# Altium PCB Integrated LED Rectangle.PcbDoc
Units mil, origin at the board's own origin, x right, y up, seen from the top; angles counter-clockwise.
Board outline 2000 x 2000 mil, 4 copper layers (Top Layer, Internal Plane 1, Internal Plane 2, Bottom Layer); 18 components, 28 nets, 81 pads, 0 vias.
Unrouted connection lines stored in the file: 45.
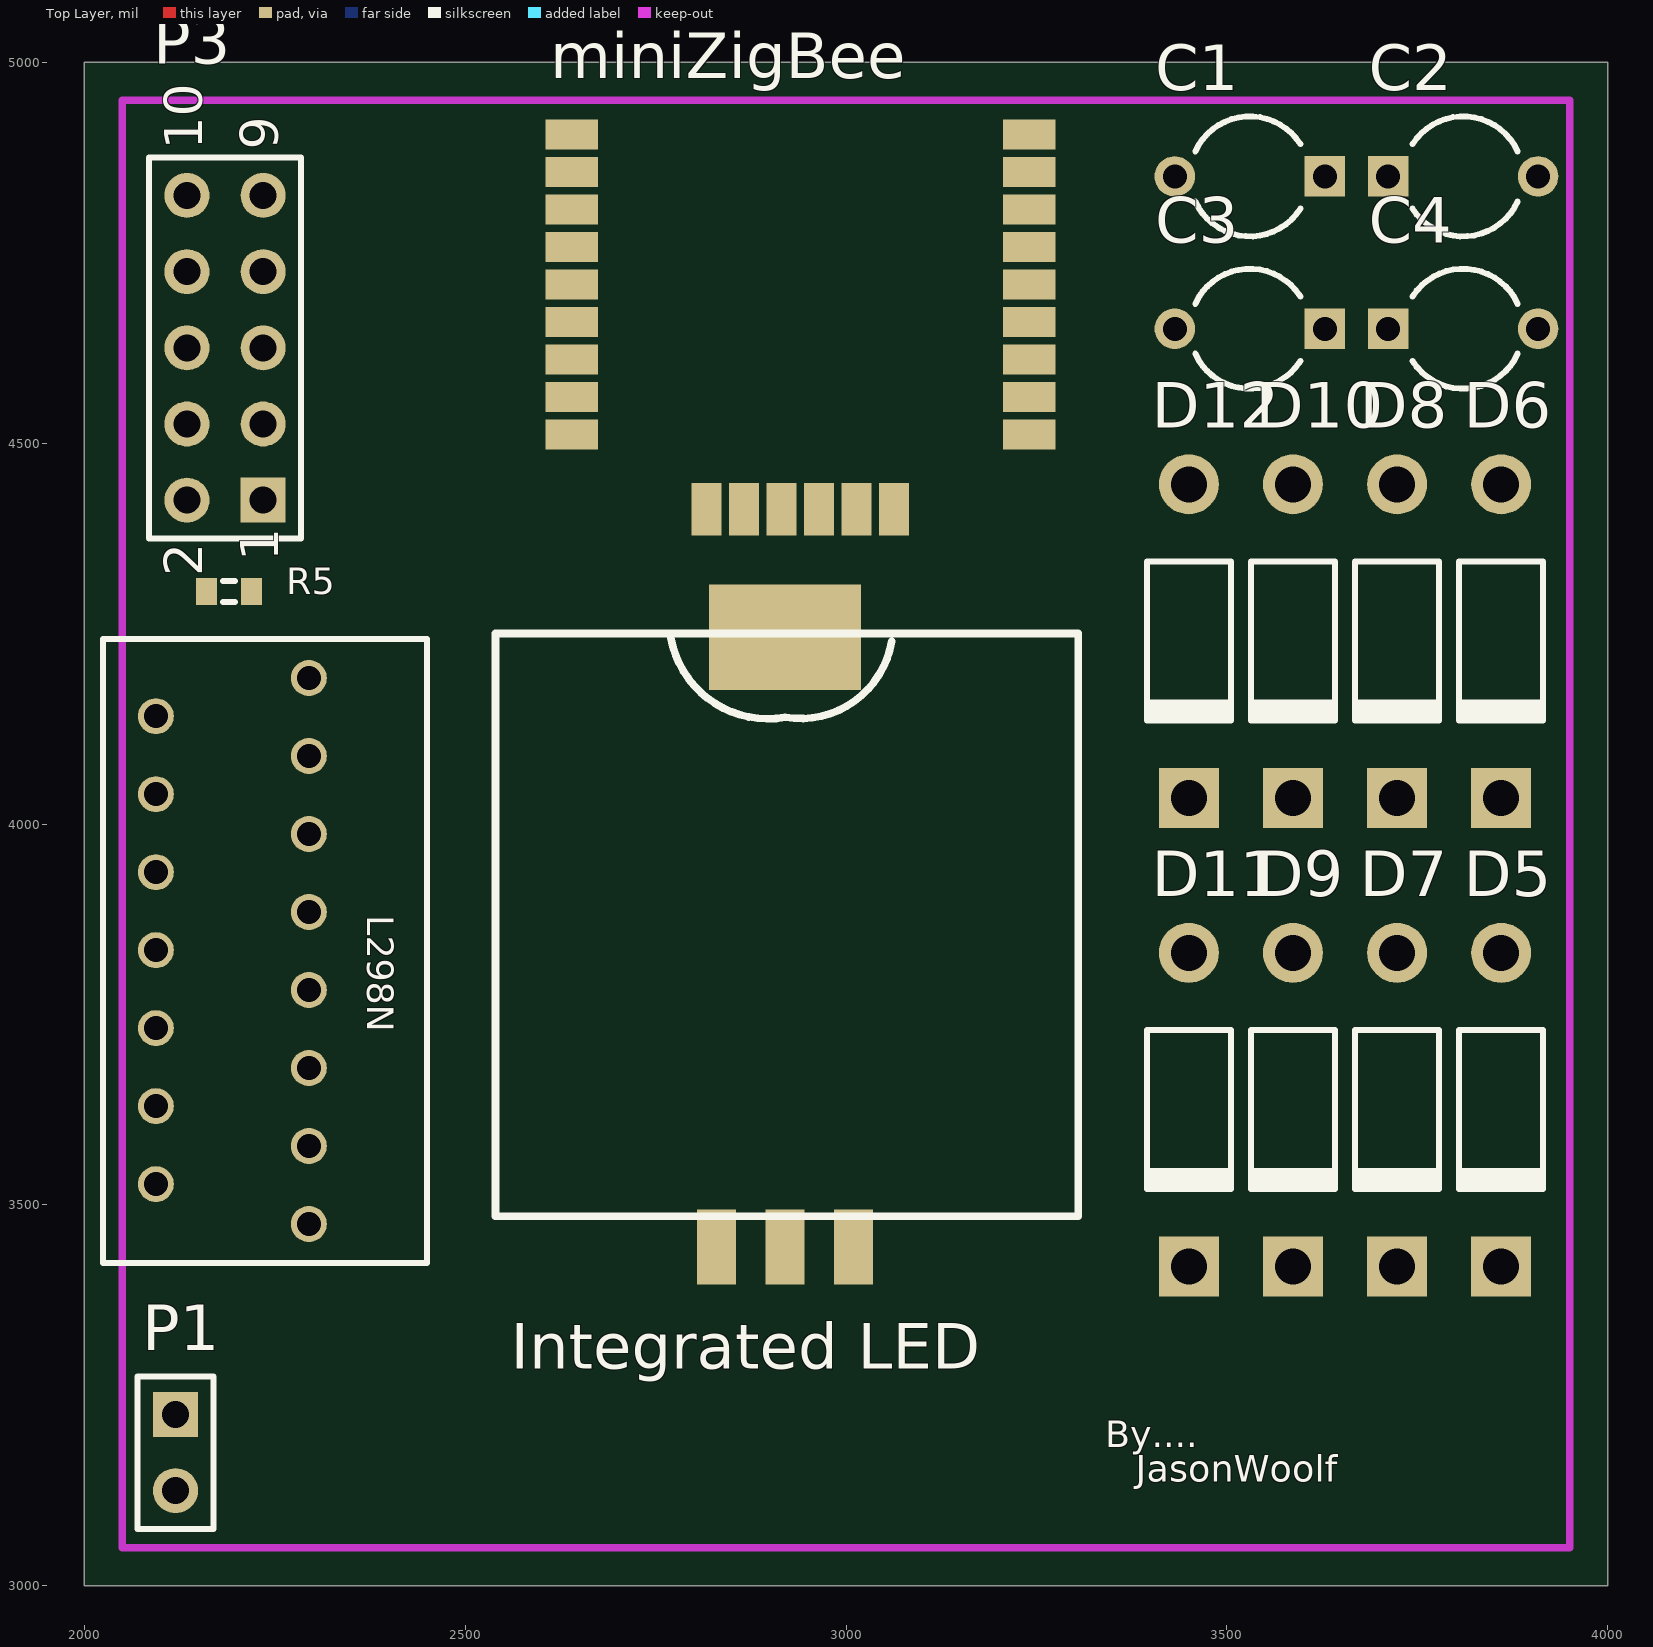
[diagram p0: Top Layer view]
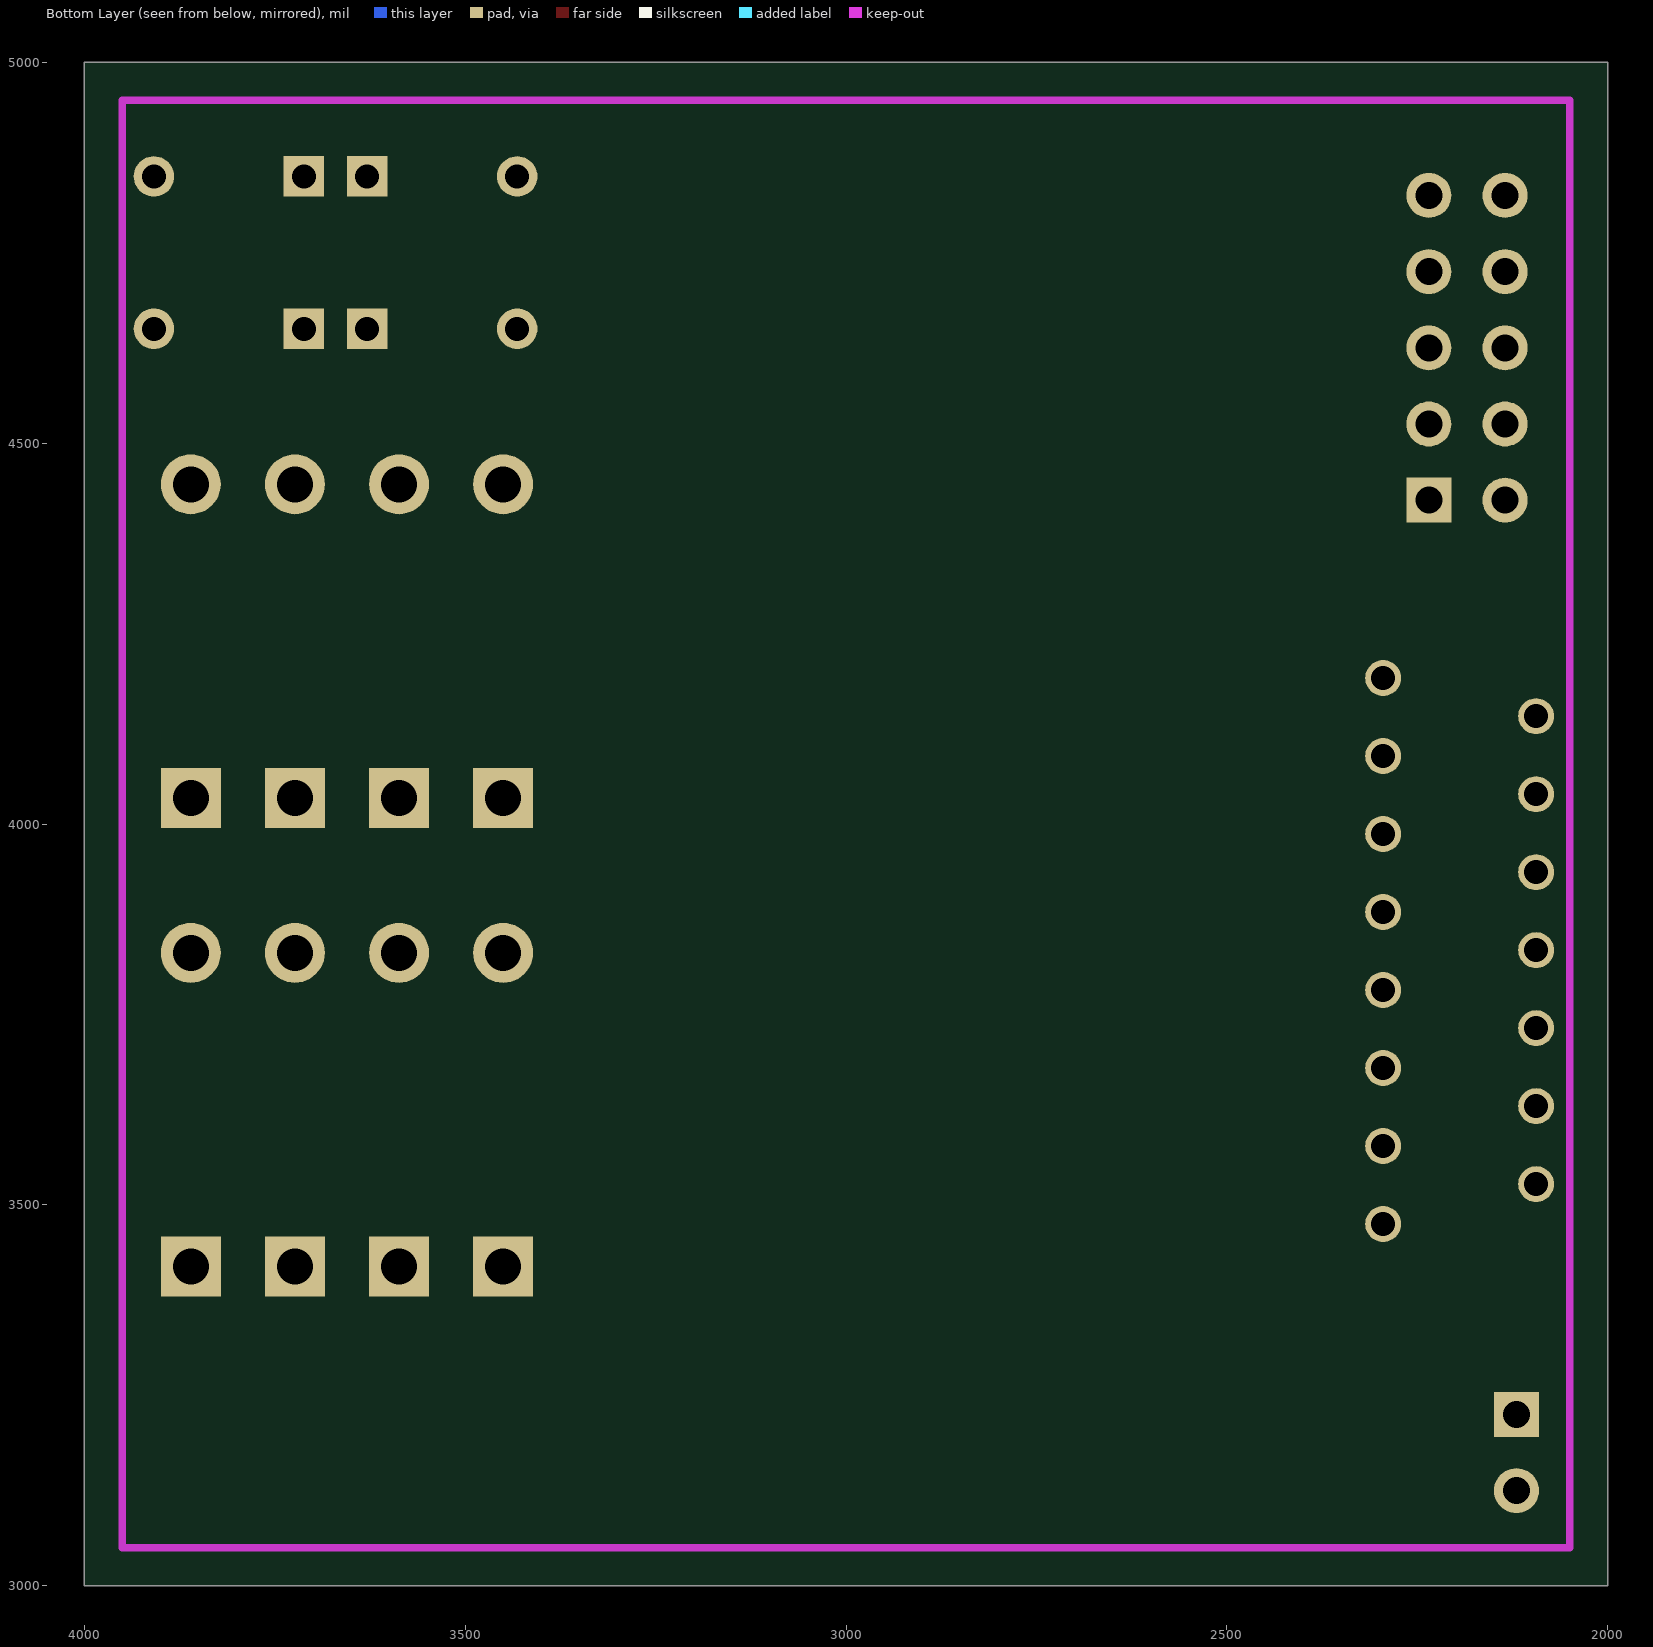
[diagram p1: Bottom Layer view, seen from below]
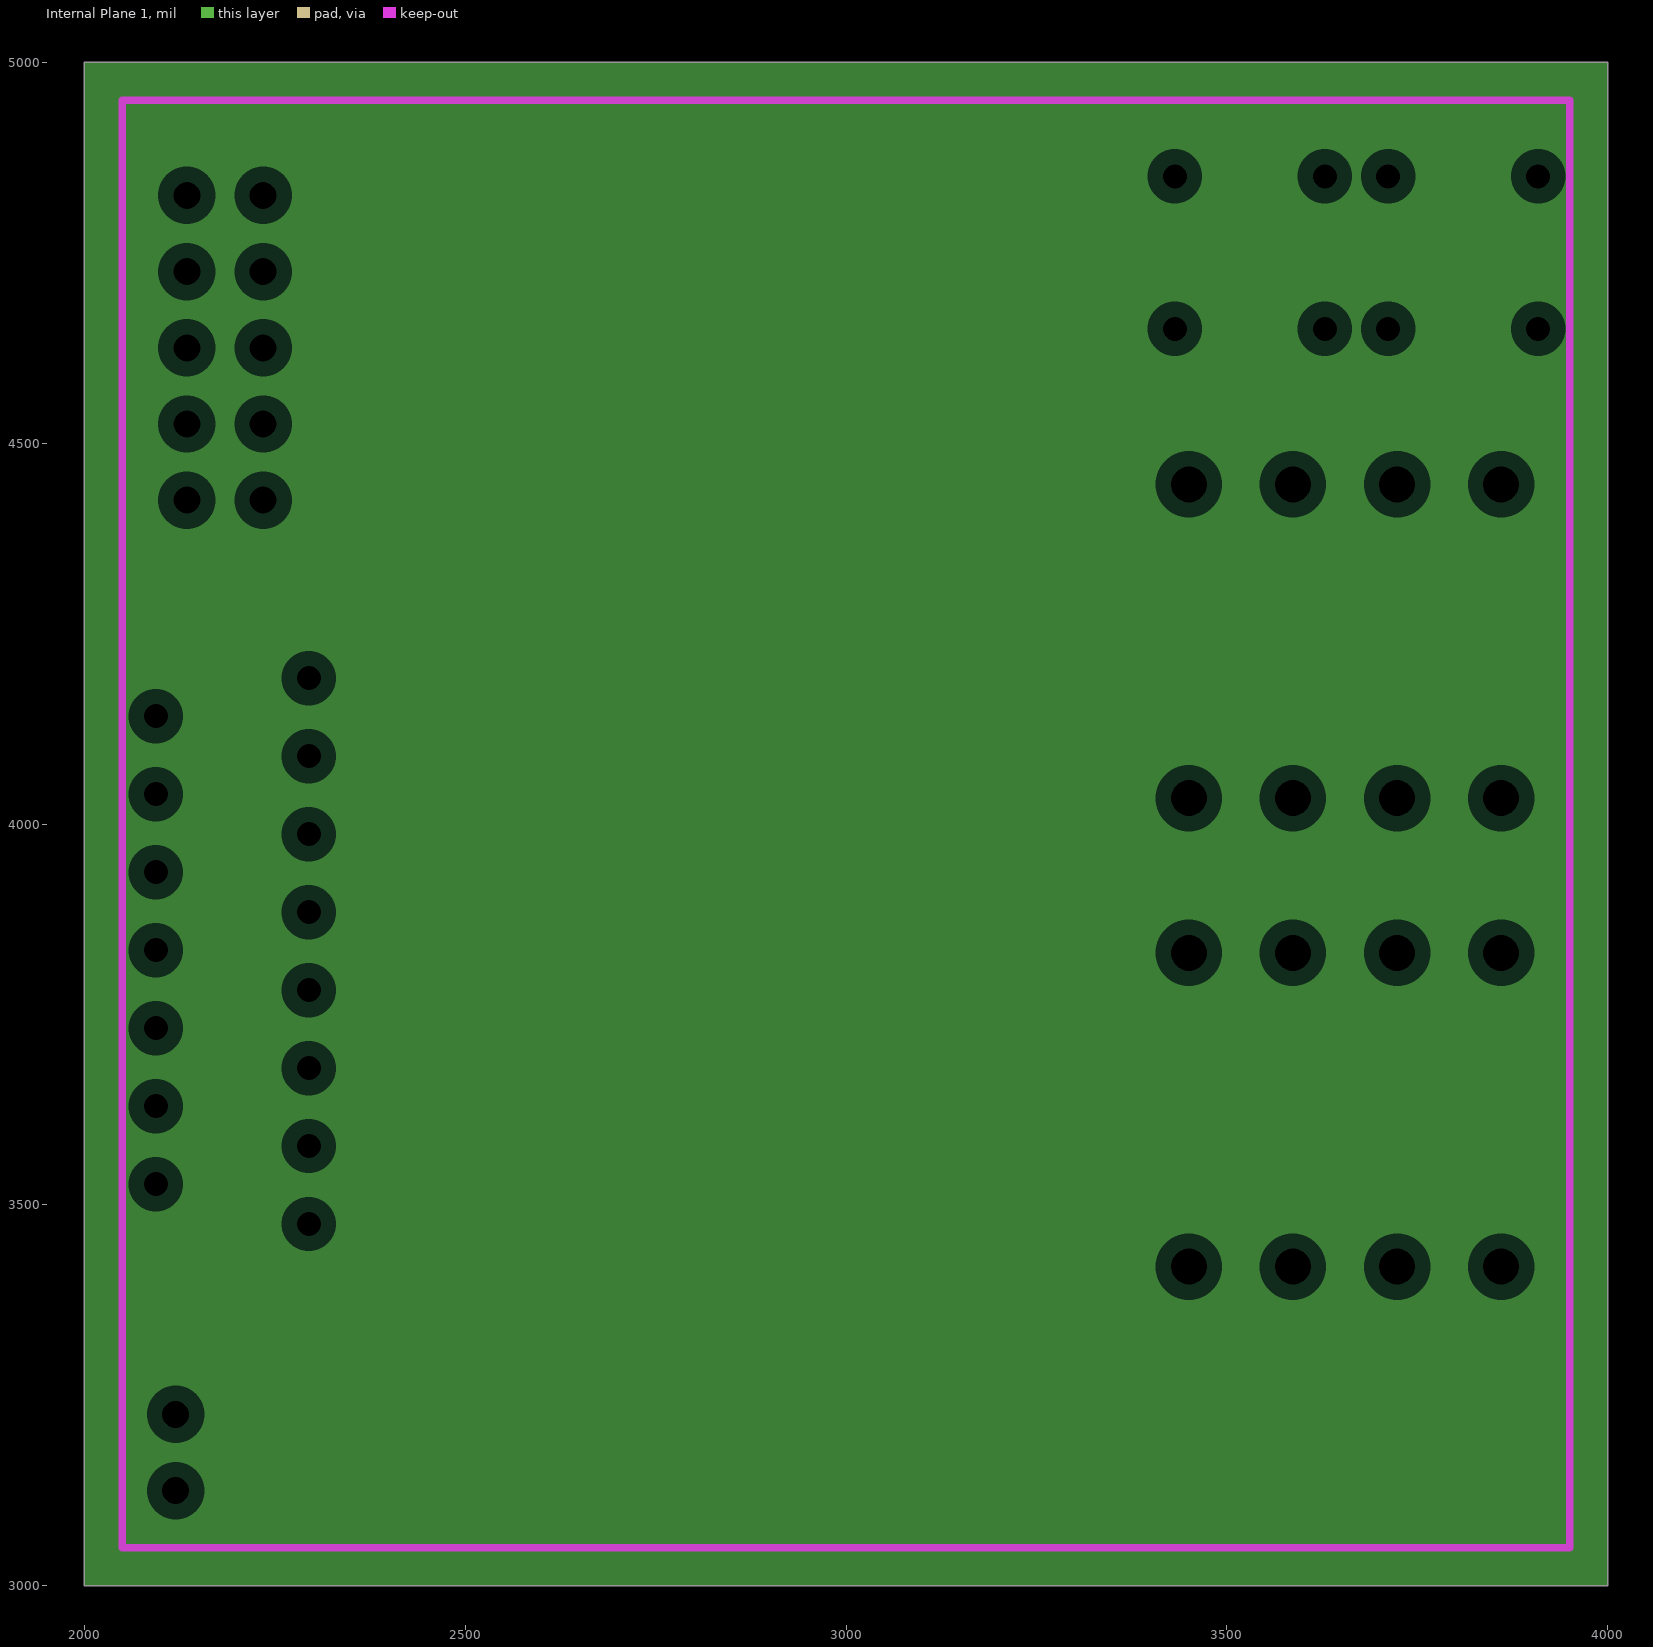
[diagram p2: Internal Plane 1, clearances drawn from the general rule]
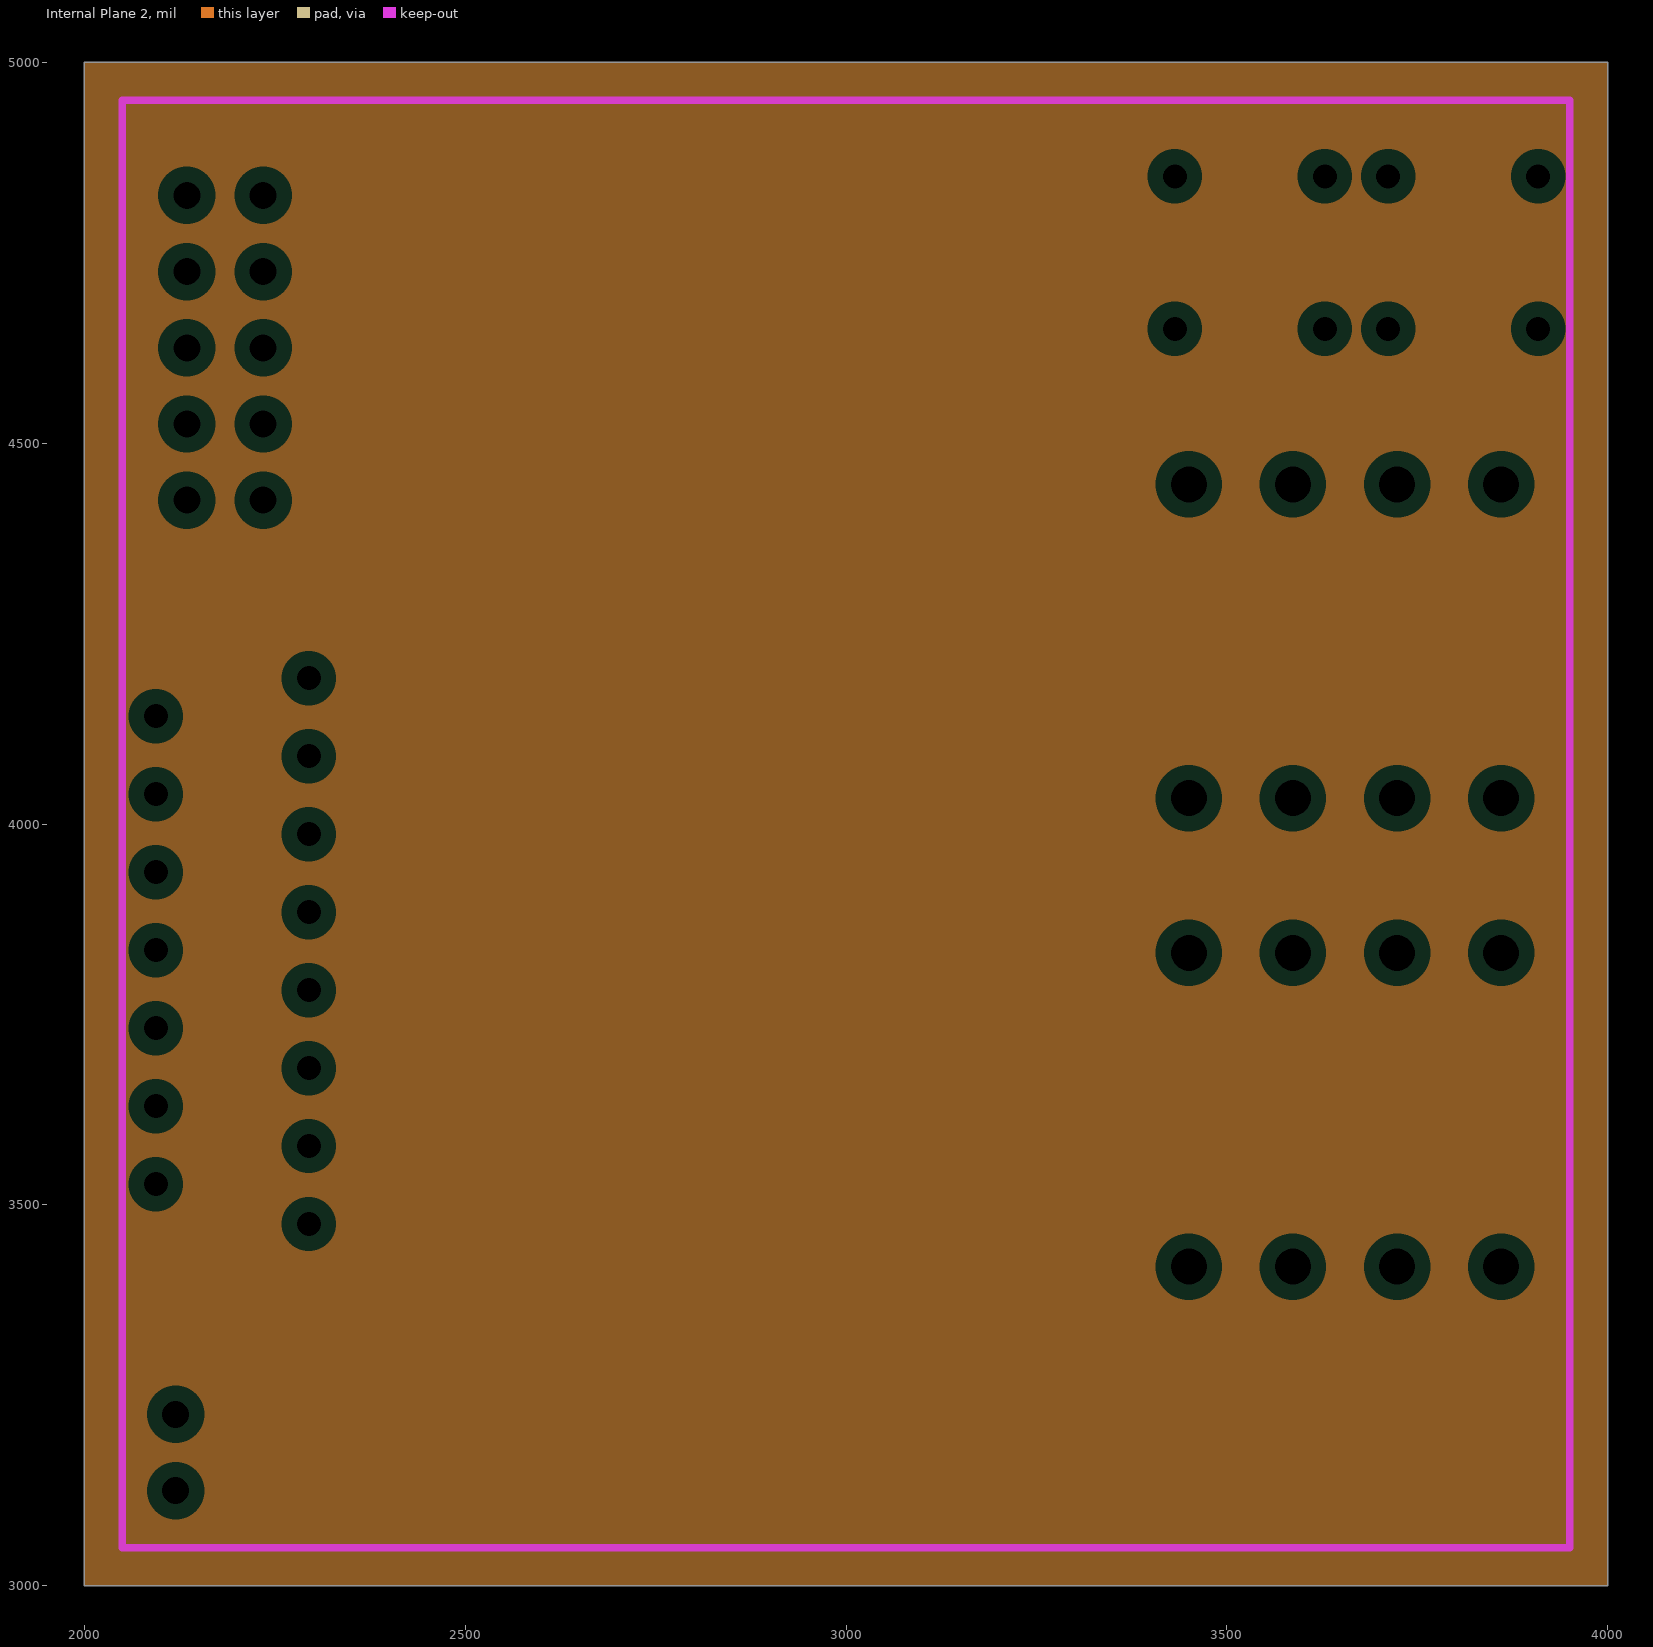
[diagram p3: Internal Plane 2, clearances drawn from the general rule]

## Layer stack, top to bottom
Top Layer: signal copper 1.4
Dielectric: dielectric 12.6, FR-4, Dk 4.8
Internal Plane 1: plane copper 1.4
Dielectric: dielectric 12.6, FR-4, Dk 4.8
Internal Plane 2: plane copper 1.4
Dielectric: dielectric 12.6, FR-4, Dk 4.8
Bottom Layer: signal copper 1.4

## Board outline
2000,3000 4000,3000 4000,5000 2000,5000

## Design rules (kind name [scope] priority, off if disabled: settings)
Clearance [All] p1: gap=13
PlaneClearance [All] p1: clearance=20
PlaneConnect [All] p1: planeconnectstyle=Relief reliefexpansion=20 reliefentries=4 reliefconductorwidth=10 reliefairgap=10
PolygonConnect [All] p1: connectstyle=Relief reliefconductorwidth=10 reliefentries=4 polygonreliefangle="90 Angle" airgapwidth=10
RoutingVias [All] p1: holewidth=32 width=62 viastyle="Through Hole" minholewidth=28 minwidth=50 maxholewidth=28 maxwidth=50
SolderMaskExpansion [All] p1: expansion=4
Width [All] p1: maxlimit=12 minlimit=12 preferedwidth=12
26 further rules are at their usual default settings.

## Components (designator, comment, footprint, x,y, rotation, side; value= is the part's Value field where it differs from the comment)
C1 "" CAPR5-4X5 3530,4850 r180 top
C2 "" CAPR5-4X5 3810,4850 r0 top
C3 "" CAPR5-4X5 3530,4650 r180 top
C4 "" CAPR5-4X5 3810,4650 r0 top
D5 "1N4007" DO-41 3860,3625 r270 top
D6 "1N4007" DO-41 3860,4240 r270 top
D7 "1N4007" DO-41 3723.33,3625 r270 top
D8 "1N4007" DO-41 3723.33,4240 r270 top
D9 "1N4007" DO-41 3586.67,3625 r270 top
D10 "1N4007" DO-41 3586.67,4240 r270 top
D11 "1N4007" DO-41 3450,3625 r270 top
D12 "1N4007" DO-41 3450,4240 r270 top
"Integrated LED" "Integrated LED" "Integrated LED" 2920,4245 r0 top
L298N "L298N" "L298N - duplicate" 2295,3475 r180 top (schematic designator U1)
miniZigBee "miniZigBee" miniZigBee 2640,4905 r0 top
P1 "Header 2" HDR1X2 2120,3225 r270 top
P3 "Header 5X2" HDR2X5 2235,4425 r90 top
R5 "Res3" J1-0603 2190,4305 r0 top

## Footprints (in the part's own frame and the unit in brackets; to place one, negate y for a bottom-side part, rotate by r counter-clockwise, add the part's x,y. Pads: shape width x height; smd on the part's side, far side on the other; paste and mask are expansions set on the pad)
CAPR5-4X5 [mm] "Capacitor; 2 Leads"
  rect 1.35x1.35 hole 0.8: 1(-2.5,0)
  round 1.35 hole 0.8: 2(2.5,0)
  silkscreen extent -1.69,-2 1.82,2
DO-41 [mm] "Diode, Axial; Body 5.2 x 2.7 mm (LxDia. max), Lead Dia. 0.86 mm (max)"
  round 2 hole 1.2: 1(-5.23,0)
  rect 2x2 hole 1.2: 2(5.23,0)
  silkscreen extent -2.65,-1.4 2.75,1.4
HDR1X2 [mm]
  rect 1.5x1.5 hole 0.9: 1(0,0)
  round 1.5 hole 0.9: 2(2.54,0)
  silkscreen extent -1.27,-1.27 3.81,1.27
HDR2X5 [mm] "Connector; Header; 5x2 Position"
  rect 1.5x1.5 hole 0.9: 1(0,0)
  round 1.5 hole 0.9: 2(0,2.54) 3(2.54,0) 4(2.54,2.54) 5(5.08,0) 6(5.08,2.54) 7(7.62,0) 8(7.62,2.54) 9(10.16,0) 10(10.16,2.54)
  silkscreen extent -1.27,-1.27 11.43,3.81
"Integrated LED" [mm] "Integrated LED"
  rect 5.08x3.524 smd: 1(0,0)
  rect 1.3x2.5 smd: 2(-2.286,-20.32) 3(0,-20.32) 4(2.286,-20.32)
  silkscreen extent -9.65,-19.3 9.78,0.13
J1-0603 [mm] "Chip Resistor, Body 1.6x0.8mm, IPC High Density"
  rect 0.7x0.9 smd: 1(-0.75,0) 2(0.75,0)
  silkscreen extent -0.2,-0.35 0.2,0.35, body extent -0.85,-0.48 0.85,0.48, height 0.9
"L298N - duplicate" [mm]
  round 1.2 hole 0.8: 1(0,0) 2(5.1,-1.33) 3(0,-2.6) 4(5.1,-3.93) 5(0,-5.2) 6(5.1,-6.53) 7(0,-7.8) 8(5.1,-9.13) 9(0,-10.4) 10(5.1,-11.73) 11(0,-13) 12(5.1,-14.33) 13(0,-15.6) 14(5.1,-16.93) 15(0,-18.2)
  silkscreen extent -3.94,-19.5 6.86,1.3
miniZigBee [mm] "miniZigBee"
  rect 1.75x1 smd: 1(0,0) 2(0,-1.25) 3(0,-2.5) 4(0,-3.75) 5(0,-5) 6(0,-6.25) 7(0,-7.5) 8(0,-8.75) 9(0,-10) 16(15.25,-10) 17(15.25,-8.75) 18(15.25,-7.5) 19(15.25,-6.25) 20(15.25,-5) 21(15.25,-3.75) 22(15.25,-2.5) 23(15.25,-1.25) 24(15.25,0)
  rect 1x1.75 smd: 10(4.5,-12.5) 11(5.75,-12.5) 12(7,-12.5) 13(8.25,-12.5) 14(9.5,-12.5) 15(10.75,-12.5)

## Part data
C1 C2 C3 C4: library part Cap2, "Capacitor"
D5 D6 D7 D8 D9 D10 D11 D12: library part "Diode 1N4007", "1 Amp General Purpose Rectifier"
P1: "Header, 2-Pin"
P3: "Header, 5-Pin, Dual row"
R5: "Resistor"

## Nets (pads, with @x,y where several pads share a name; then routed paths per layer and width w, separated by ;. In a path a pad name is that pad's centre, name@x,y a point inside that pad or via, vN(x,y) a via of type N, cw(c..) or ccw(c..) an arc to the next point about the centre after c; other vN are vias at no path point)
+5V: C1.1 C2.1 L298N.6 L298N.9 L298N.11
+12V: "Integrated LED.1" C3.1 C4.1 D5.2 D7.2 D9.2 D11.2 L298N.4
BLUE: "Integrated LED.2" D9.1 D10.2 L298N.13
GND: C1.2 C2.2 C3.2 C4.2 D6.1 D8.1 D10.1 D12.1 L298N.1 L298N.8 L298N.15 miniZigBee.1 P3.1
GREEN: "Integrated LED.3" D7.1 D8.2 L298N.3
P0_0: miniZigBee.23
P0_1: miniZigBee.22
P0_2: miniZigBee.21
P0_3: miniZigBee.20
P0_4: miniZigBee.19
P0_5: miniZigBee.18
P0_6: miniZigBee.17
P0_7: L298N.10 miniZigBee.16
P1_0: L298N.7 miniZigBee.15
P1_1: L298N.5 miniZigBee.14
P1_2: miniZigBee.13
P1_3: miniZigBee.12
P1_4: miniZigBee.11 P3.5
P1_5: miniZigBee.10
P1_6: miniZigBee.7
P1_7: miniZigBee.6
P2_0: miniZigBee.5
P2_1: miniZigBee.4
P2_2: miniZigBee.3 P3.3 R5.2
RED: "Integrated LED.4" D5.1 D6.2 L298N.2
RESET: miniZigBee.24 P3.7
TEST: D11.1 D12.2 L298N.14 P1.1 P1.2
VCC: miniZigBee.2 P3.2 R5.1
pads on no net: L298N.12 miniZigBee.8 miniZigBee.9 P3.4 P3.6 P3.8 P3.9 P3.10

## Polygon pours and split planes (outlines as drawn)
no net on Internal Plane 1 (split plane): 4000,3000 2000,3000 2000,5000 4000,5000
no net on Internal Plane 2 (split plane): 4000,3000 2000,3000 2000,5000 4000,5000

## Keep-outs
Keep-Out Layer:
  lines w10: 2050,3050 2050,4950 3950,4950 3950,3050 2050,3050

## Silkscreen, mask and mechanical layers (free items; w line width, h text height)
Top Overlay:
  text "By...." at 3340,3170 h60
  text "JasonWoolf" at 3380,3125 h60

## Dimensions
2050,3050 to 2050,4950 on Mechanical 1
2050,3050 to 3950,3050 on Mechanical 1

## Text inside footprints (layer, text, board x,y; h text height)
P3: Top Overlay "2" at 2155,4325 h50 r90; Top Overlay "1" at 2255,4345 h50 r90; Top Overlay "9" at 2255,4885 h50 r90; Top Overlay "10" at 2155,4885 h50 r90